# Altium PCB PCB_AUTO-PUMP.PcbDoc
Units mm, origin at the board's own origin, x right, y up, seen from the top; angles counter-clockwise.
Board outline 101.09 x 71.12 mm, 2 copper layers (Top Layer, Bottom Layer); 37 components, 23 nets, 127 pads, 4 vias.
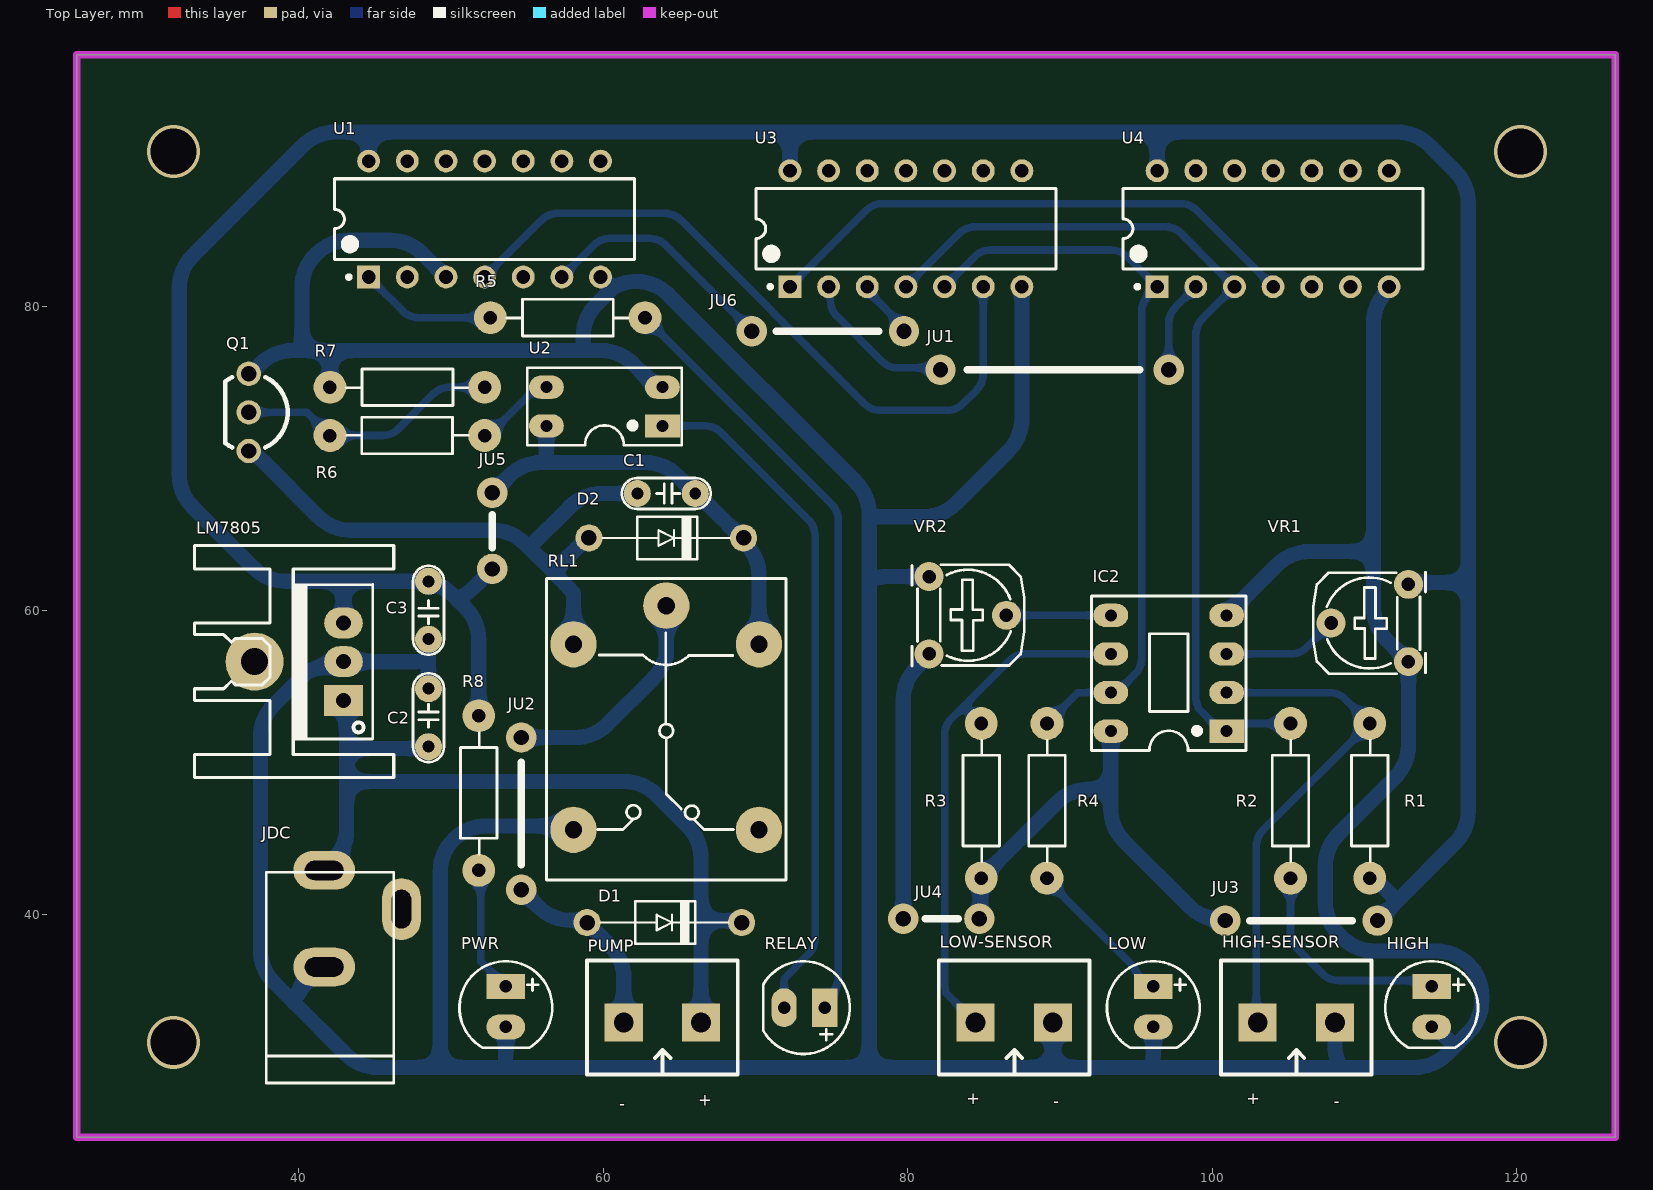
[diagram p0: Top Layer view]
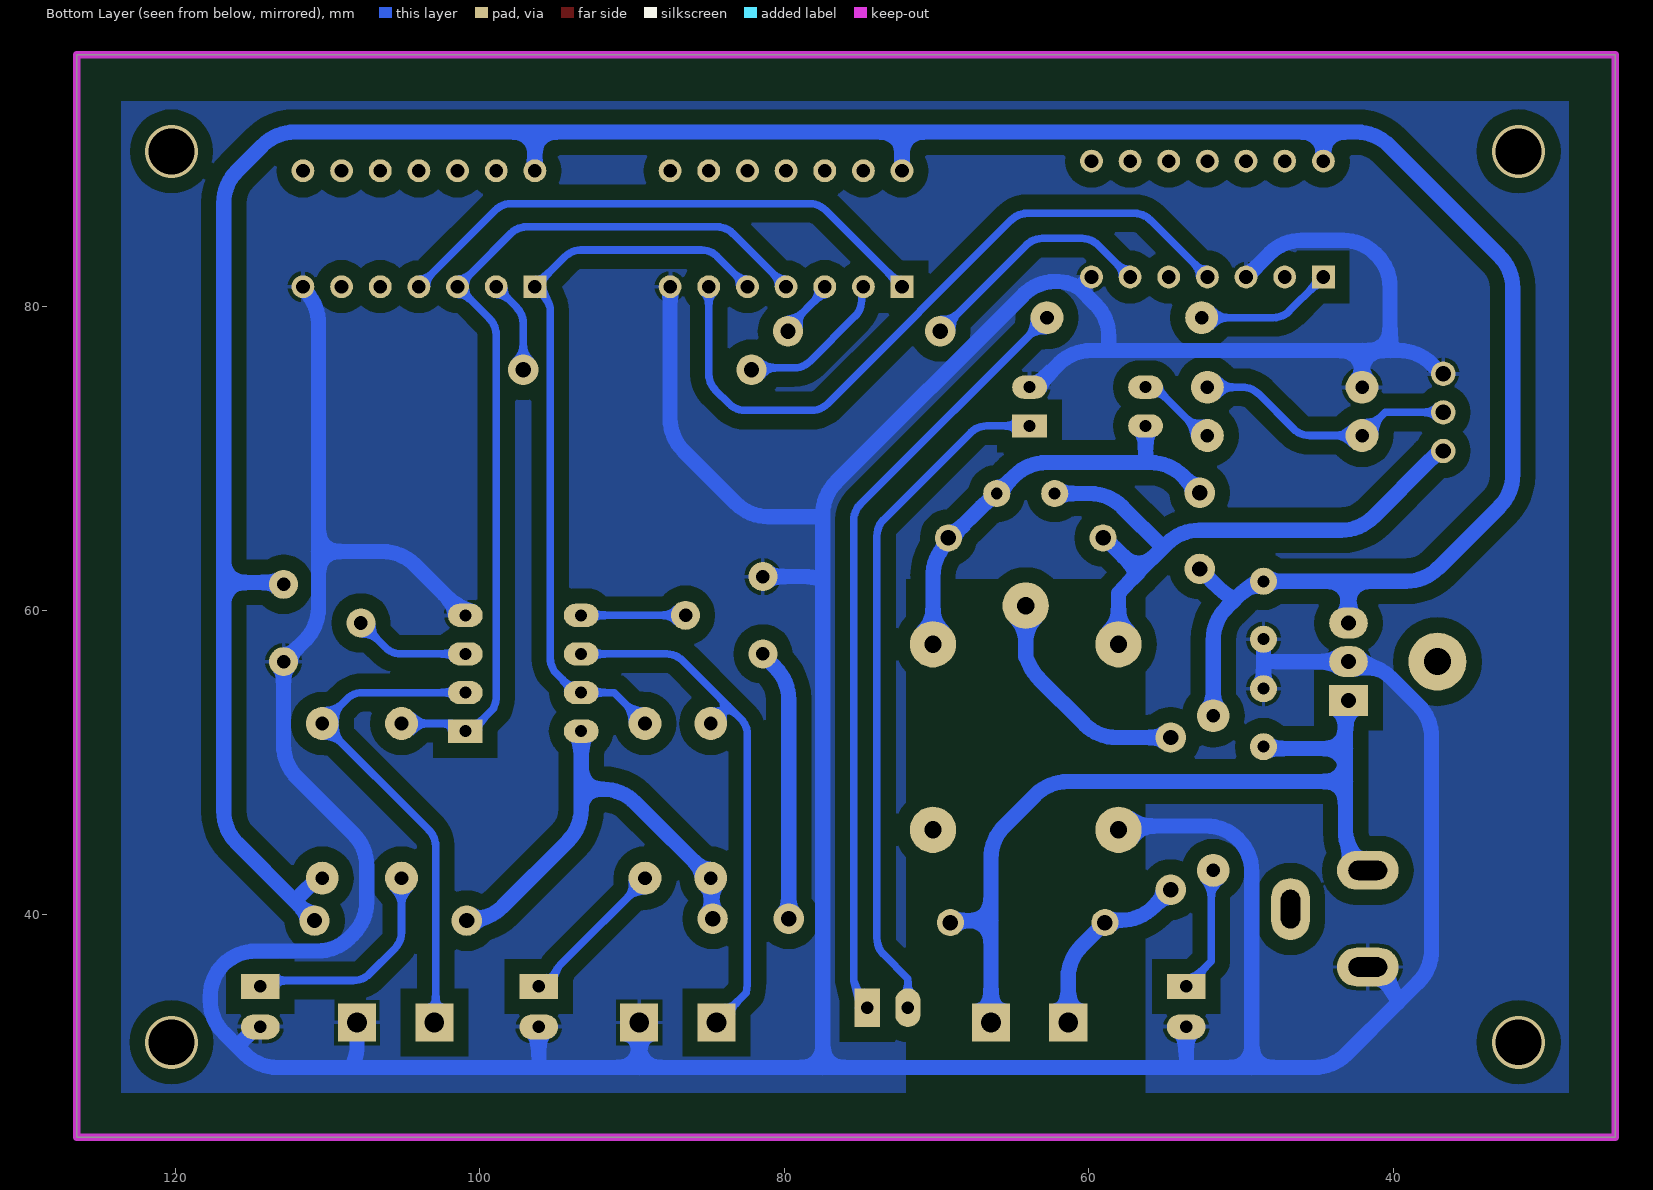
[diagram p1: Bottom Layer view, seen from below]
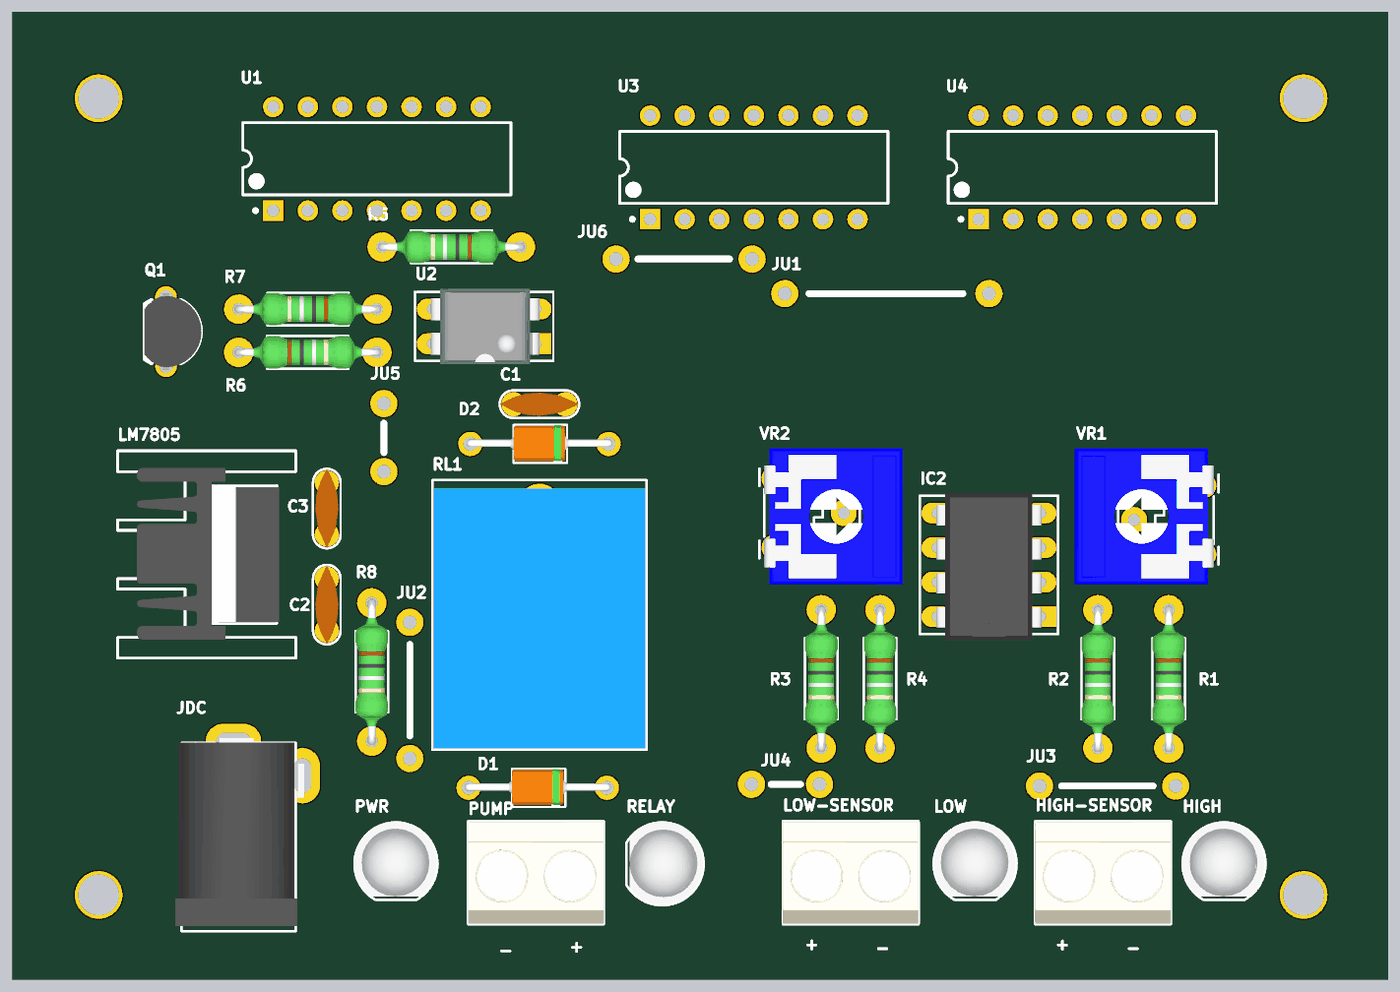
[diagram p2: 3D render of the assembled board from above, using the file's embedded part models]

## Layer stack, top to bottom
Top Solder: solder mask 0.0102, Solder Resist, Dk 3.5
Top Layer: signal copper 0.0356
Dielectric 1: dielectric 0.32, FR-4, Dk 4.8
Bottom Layer: signal copper 0.0356
Bottom Solder: solder mask 0.0102, Solder Resist, Dk 3.5

## Board outline
25.4,25.4 25.4,96.52 126.492,96.52 126.492,25.4

## Design rules (kind name [scope] priority, off if disabled: settings)
Clearance [All] p1: gap=0.5 ignorepadtopadclearanceinfootprint=FALSE
PolygonConnect [All] p1: connectstyle=Relief reliefconductorwidth=0.254 reliefentries=4 polygonreliefangle="90 Angle" airgapwidth=0.254
RoutingVias [All] p1: holewidth=1 width=1.5 viastyle="Through Hole" minholewidth=1 minwidth=1.5 maxholewidth=1 maxwidth=1.5
SolderMaskExpansion [All] p1: expansion=0.102 istentingtop=FALSE
Width [All] p1: maxlimit=1 minlimit=0.4 preferedwidth=0.5
30 further rules are at their usual default settings.

## Components (designator, comment, footprint, x,y, rotation, side; value= is the part's Value field where it differs from the comment)
C1 "100nF" CN1.5 64.262,67.691 r180 top value=33pF
C2 "1uF" CN1.5 48.514,53.086 r270 top value=33pF
C3 "100nF" CN1.5 48.514,59.893 r90 top value=33pF
D1 "1N4007" DIO-1A 58.928,39.497 r0 top value=1N5007
D2 "1N4007" DIO-1A 59.055,64.77 r0 top value=1N5007
HIGH "LED" LED-5-Green 114.427,35.179 r270 top value="LED 3 ly Single Colour"
HIGH-SENSOR "KF2" KF2-5.08 105.537,32.931 r180 top
IC2 "LM358" DIP8 97.155,55.753 r90 top
JDC "Jac DC" DC0 44.196,39.751 r90 top
JU1 "JUMPER" "JUMPER 15MM" 82.155,75.819 r0 top
JU2 "JUMPER" "JUMPER 10MM" 54.61,41.656 r90 top
JU3 "JUMPER" "JUMPER 10MM" 110.871,39.624 r180 top
JU4 "JUMPER" "JUMPER 5MM" 84.709,39.751 r180 top
JU5 "JUMPER" "JUMPER 5MM" 52.705,62.738 r90 top
JU6 "JUMPER" "JUMPER 10MM" 79.756,78.359 r180 top
LM7805 "LM78xx" TO220H1 42.926,56.642 r90 top
LOW "LED" LED-5-Green 96.139,35.179 r270 top value="LED 3 ly Single Colour"
LOW-SENSOR "KF2" KF2-5.08 86.995,32.931 r180 top
PUMP "KF2" KF2-5.08 63.881,32.931 r180 top
PWR "LED" LED-5-Green 53.594,35.179 r270 top value="LED 3 ly Single Colour"
Q1 "SS8050-DIP" SS8050DIP 36.703,73.025 r270 top
R1 "22K" RES-1/4W 110.49,47.879 r90 top
R2 "1K" RES-1/4W 105.283,47.879 r90 top
R3 "22K" RES-1/4W 84.963,47.879 r90 top
R4 "1K" RES-1/4W 89.281,47.879 r90 top
R5 "1K" RES-1/4W 58.039,79.121 r0 top
R6 "1K" RES-1/4W 46.736,71.628 r180 top
R7 "10K" RES-1/4W 47.498,74.549 r0 top
R8 "1K" RES-1/4W 51.943,48.387 r90 top
RELAY "LED" LED-5-Green 74.422,33.909 r180 top value="LED 3 ly Single Colour"
RL1 "Relay 10A/12V" "RELAY 5" 64.135,52.07 r270 top value="Relay SPDT, 10A, 12V"
U1 "CD4013BE" N0014A 52.197,85.725 r90 top
U2 "PC817" DIP4 63.881,72.136 r90 top
U3 "CD74HC08E" N0014A 79.883,85.09 r90 top
U4 "SN7404N" N0014A 104.013,85.09 r90 top
VR1 "50K" VR-S2 112.903,56.642 r90 top value="Volume 50k"
VR2 "50K" VR-S2 81.407,62.23 r270 top value="Volume 50k"

## Footprints (in the part's own frame and the unit in brackets; to place one, negate y for a bottom-side part, rotate by r counter-clockwise, add the part's x,y. Pads: shape width x height; smd on the part's side, far side on the other; paste and mask are expansions set on the pad)
CN1.5 [mil]
  round 70 hole 31: 1(-70,0) 2(80,0)
  silkscreen extent -110,-40 120,40, body extent -110,-33 120,33, height 235
DC0 [mil] "Jac DC input"
  oval 100x160 hole 50 slot 100 at 90 deg: 1(125,100) 2(-125,100)
  oval 160x100 hole 50 slot 100 at 0 deg: 3(25,-100)
  silkscreen extent -425,-80 120,250, body extent -410,-105 134,269, height 434
DIO-1A [mil]
  round 70 hole 40: 1(0,0) 2(400,0)
  silkscreen extent 35,-55 365,55, body extent -11,-50 411,54, height 102
DIP4 [mil]
  rect 60x90 hole 31: 1(0,0)
  oval 60x90 hole 31: 2(100,0) 3(100,300) 4(0,300)
  silkscreen extent -50,-50 150,350, body extent -59,-10 159,305, height 170
DIP8 [mil] "DIP, 8-Leads, Row Spacing 7.62mm, Pitch 2.54mm, Body 9.91x6.73mm"
  rect 60x90 hole 31: 1(-145,-150)
  oval 60x90 hole 31: 2(-45,-150) 3(55,-150) 4(155,-150) 5(155,150) 6(55,150) 7(-45,150) 8(-145,150)
  silkscreen extent -195,-200 205,200, body extent -213,-153 213,153, height 177
"JUMPER 5MM" [mm]
  round 2 hole 1: 1(0,0) 2(5,0)
  silkscreen extent 1.4,0 3.56,0
"JUMPER 10MM" [mm]
  round 2 hole 1: 1(0,0) 2(10,0)
  silkscreen extent 1.65,0 8.38,0
"JUMPER 15MM" [mm]
  round 2 hole 1: 1(0,0) 2(15,0)
  silkscreen extent 1.78,0 13.08,0
KF2-5.08 [mm]
  rect 2.5x2.5 hole 1.3: 1(-2.54,0) 2(2.54,0)
  silkscreen extent -4.95,-4.08 4.95,3.43, body extent -5,-4.07 5,3.43, height 10
LED-5-Green [mil] "LED 2 PIN, 5 ly , Only colour,pin to pin 100mil"
  rect 65x100 hole 32: 1(-5,0)
  oval 65x100 hole 32: 2(100,0)
  silkscreen extent -70,-120 154,120, body extent -69,-120 145,117, height 339
N0014A [mm] "DIP, 14-Leads, Body 19.7x6.6mm, Pitch 2.54mm"
  rect 1.5x1.5 hole 0.9: 1(-3.81,7.62)
  round 1.5 hole 0.9: 2(-3.81,5.08) 3(-3.81,2.54) 4(-3.81,0) 5(-3.81,-2.54) 6(-3.81,-5.08) 7(-3.81,-7.62) 8(3.81,-7.62) 9(3.81,-5.08) 10(3.81,-2.54) 11(3.81,0) 12(3.81,2.54) 13(3.81,5.08) 14(3.81,7.62)
  silkscreen extent -3.93,-9.85 2.65,9.85, body extent -3.95,-9.85 3.95,9.85, height 5.08
"RELAY 5" [mil] "Reley DPDT, 8 pin, 1A, W400mil, L800mil,H 300mil"
  round 120 hole 45: 1(-325,0) 2(255,240) 3(255,-240) 4(-225,-240) 5(-225,240)
  silkscreen extent -395,-310 385,310, body extent -371,-304 381,306, height 602
RES-1/4W [mil]
  round 85 hole 35: 1(-215,5) 2(185,5)
  silkscreen extent -173,-42 141,52, body extent -227,-42 197,52, height 95
SS8050DIP [mm] "NPN BJT"
  round 1.6 hole 1 mask+0.1: 1(-2.54,0) 2(0,0) 3(2.54,0)
  silkscreen extent -2.31,-1.55 2.31,2.55, body extent -2.79,-1.59 2.79,2.61, height 7
TO220H1 [mil] "TO-220 - 1-2-3"
  round 150 hole 70: 0(0,230)
  rect 80x100 hole 39: 1(-100,0)
  oval 80x100 hole 39: 2(0,0) 3(100,0)
  silkscreen extent -300,-130 300,385, body extent -246,-82 250,329, height 1000
VR-S2 [mil] "Resistor Variable"
  round 75 hole 35: 1(0,0) 2(100,200) 3(200,0)
  silkscreen extent -31,-44 231,246, body extent -87,-30 307,372, height 165

## Part data
C1 C2 C3: library part CN
D1 D2: library part Diode, "Default Diode", Code - JEDEC=DO-214-AB, Published=8-Jun-2000, Publisher="Altium Limited", Revision="July-2002: Re-released for DXP Platform."
HIGH LOW PWR RELAY: "LED Single colour Green and Red"
HIGH-SENSOR LOW-SENSOR PUMP: Manufacturer="Würth Elektronik eiSos GmbH", PartNo=691103110002, ComponentLink1 Description=Manufacturer, ComponentLink1URL=http://www.we-online.com, ComponentLink2 Description=Datasheet, ComponentLink2URL=http://katalog.we-online.de/em/datasheet/6911031100xx.pdf, Created by="Karrer Zheng", Created Date="29 October 2013", NoPins=2
IC2: "Low-Power Dual Operational Amplifier"
JDC: library part DCIN, "Jac DC input"
LM7805: "Positive Voltage Regulator", ComponentLink1Description="Manufacturer Link", ComponentLink1URL=http://www.st.com/, ComponentLink2Description=Datasheet, ComponentLink2URL=http://www.st.com/stonline/products/literature/ds/2146/l78m05c.pdf, DatasheetVersion=Apr-1994, LatestRevisionDate=17-Jul-2002, LatestRevisionNote="Re-released for DXP Platform.", Note="Tab is connected to pin 3 (GND).", PackageDescription="TO, Thru-Hole, Vertical, Heatsink Mounted; 3 In-Line Leads; Pitch 2.54 mm; Pin sequence 1, 3, 2", PackageReference=ISOWATT220AB, PackageVersion=Jul-1998, Published=24-Aug-2001, Publisher="Altium Limited"
Q1: "NPN transistor through hole"
R1 R2 R3 R4 R5 R6 R7 R8: library part Res, "Res", Manufacturer="Generic Components", Class=Passive, Published=08/06/2000, Publisher="Altium Hobart Technology Centre", SubClass=R
RL1: library part "Relay 5", "Relay SPDT,10A - 12VDC 5 Pin"
U1: library part CMP-1619-00744-2, "CMOS Dual D-Type Flip Flop, N0014A, TUBE", F @ Nom Voltage(Max)(Mhz)=8, Generic Part Number=CD4013B, ICC @ Nom Voltage(Max)(mA)=0.06, Manufacturer="Texas Instruments", Operating Temperature Range(C)="-55 to 125", Rating=Military, tpd @ Nom Voltage(Max)(ns)=130, Voltage(Nom)(V)=10, 3-State Output=No, Bits(#)=2, Code_JEDEC=MS-001, DatasheetVersion=SCHS023D, Input Type=CMOS, Output Drive (IOL/IOH)(Max)(mA)=1.5/-1.5, Output Logic=Inverted,Non-inverted, Output Type=CMOS, PackageReference=N0014A, Schmitt Trigger=No, Technology Family=CD4000, VCC(Max)(V)=18, VCC(Min)(V)=3
U2: "Single Opto"
U3: library part CMP-0777-00277-3, "High Speed CMOS Logic Quad 2-Input AND Gates, N0014A, TUBE", F @ Nom Voltage(Max)(Mhz)=70, Generic Part Number=CD74HC08, ICC @ Nom Voltage(Max)(mA)=0.02, Manufacturer="Texas Instruments", Operating Temperature Range(C)="-55 to 125", Rating=Catalog, tpd @ Nom Voltage(Max)(ns)=23, Voltage(Nom)(V)=5, Bits(#)=4, DatasheetVersion=SCHS118C, Input Type=CMOS, Output Drive (IOL/IOH)(Max)(mA)=-24/24, Output Type=CMOS, PackageReference=N0014A, Schmitt Trigger=No, Technology Family=HC, VCC(Max)(V)=6, VCC(Min)(V)=2
U4: library part CMP-1615-00872-2, "Hex inverters, N0014A, TUBE", F @ Nom Voltage(Max)(Mhz)=35, Generic Part Number=SN7404, ICC @ Nom Voltage(Max)(mA)=0.033, Manufacturer="Texas Instruments", Operating Temperature Range(C)="0 to 70", Rating=Catalog, tpd @ Nom Voltage(Max)(ns)=22, Voltage(Nom)(V)=5, Bits(#)=6, Code_JEDEC=MS-001, DatasheetVersion=SDLS029C, Input Type=TTL, Output Drive (IOL/IOH)(Max)(mA)=-0.4/16, Output Type=CMOS, PackageReference=N0014A, Schmitt Trigger=No, Technology Family=TTL, VCC(Max)(V)=5.25, VCC(Min)(V)=4.75
VR1 VR2: library part VR-S, "Var Resistor"

## Via types
v1: diameter 3.5, hole 3, Top Layer to Bottom Layer, 4 vias

## Nets (pads, with @x,y where several pads share a name; then routed paths per layer and width w, separated by ;. In a path a pad name is that pad's centre, name@x,y a point inside that pad or via, vN(x,y) a via of type N, cw(c..) or ccw(c..) an arc to the next point about the centre after c; other vN are vias at no path point)
5V: C1.1 C3.2 D2.2 IC2.8 JU3.1 JU3.2 JU4.1 JU4.2 JU5.1 JU5.2 LM7805.3 R1.1 R3.1 R8.2 RL1.5 U1.14 U2.4 U3.14 U4.14 VR1.3 VR2.3 | length 279.1
  Bottom Layer w1: LM7805.3 42.926,61.925 ; U1.14 44.577,91.44 ; R8.2 51.816,58.066 ccw(c48.816,58.066) 50.937,60.188 50.355,60.77 ; JU5.1 ccw(c54.762,60.554) 52.637,62.671 51.991,62.024 cw(c49.863,64.139) 51.984,62.017 51.421,61.454 cw(c49.303,63.579) 50.356,60.77 ; JU5.2 53.813,68.846 cw(c55.933,66.723) 55.933,69.723 62.765,69.723 cw(c62.765,66.723) 64.887,68.844 C1.1 66.957,66.891 cw(c64.988,64.628) 67.112,66.746 68.636,65.222 ccw(c70.758,67.343) 69.213,64.771 D2.2 ccw(c71.932,66.041) 69.407,64.422 69.46,64.339 cw(c66.936,62.717) 69.464,64.333 69.754,63.881 cw(c67.231,62.257) 70.231,62.257 RL1.5 ; 56.134,69.723 ccw(c53.261,70.587) 56.261,70.583 U2.4 ; U3.14 72.263,91.44 ; JU4.2 79.709,54.137 cw(c82.709,54.137) 80.585,56.256 81.055,56.726 ccw(c78.932,58.845) VR2.3 ; JU4.1 ccw(c81.772,40.365) 84.772,40.361 84.772,41.804 cw(c87.773,41.804) R3.1 89.801,47.383 cw(c91.921,45.26) 91.921,48.26 93.345,48.26 ; IC2.8 93.345,48.26 ; U4.14 ccw(c93.393,88.906) 96.393,88.902 96.393,91.44 ; JU3.2 100.865,39.625 ccw(c100.311,36.677) 100.626,39.66 100.313,39.694 cw(c100.631,42.677) 98.512,40.553 94.222,44.843 cw(c96.345,46.963) 93.345,46.963 93.345,48.26 ; R1.1 110.366,42.417 cw(c109.199,39.653) 111.323,41.772 111.791,41.304 ccw(c113.916,43.422) 112.204,40.958 ; JU3.1 112.204,40.957 ; VR1.3 cw(c113.767,58.849) 113.763,61.849 116.84,61.849 ; 42.926,61.925 39.139,61.925 cw(c39.139,64.925) 37.02,62.802 33.008,66.814 cw(c35.131,68.934) 32.131,68.934 32.131,81.18 cw(c35.131,81.18) 33.007,83.299 40.271,90.563 cw(c42.391,88.44) 42.391,91.44 44.577,91.44 ; 42.926,61.925 C3.2 49.11,61.652 49.289,61.57 cw(c48.041,58.842) 50.167,60.958 50.352,60.773 50.355,60.77 ; 44.577,91.44 72.263,91.44 ; 72.263,91.44 96.393,91.44 ; 96.393,91.44 112.168,91.44 cw(c112.168,88.44) 114.291,90.56 115.96,88.891 cw(c113.84,86.768) 116.84,86.768 116.84,61.849 ; 112.204,40.957 115.963,44.716 ccw(c113.84,46.836) 116.84,46.836 116.84,61.849
12V: C2.2 D1.2 JDC.1 LM7805.1 PUMP.1 | length 56.6
  Bottom Layer w1: JDC.1 42.108,42.926 cw(c44.813,41.628) 42.207,43.115 42.72,44.01 ccw(c40.116,45.501) 43.116,45.497 43.116,48.768 ; LM7805.1 43.116,53.586 43.116,50.927 ; C2.2 cw(c47.65,53.927) 47.65,50.927 43.116,50.927 ; PUMP.1 66.421,39.624 ; D1.2 69.082,39.499 ccw(c68.224,36.624) 68.224,39.624 66.421,39.624 ; 43.116,48.768 61.368,48.768 cw(c61.368,45.768) 63.491,47.888 65.541,45.838 cw(c63.421,43.715) 66.421,43.715 66.421,39.624 ; 43.116,48.768 43.116,50.927
GND: C2.1 C3.1 HIGH-SENSOR.1 HIGH.2 IC2.4 JDC.2 LM7805.2 LOW-SENSOR.1 LOW.2 PWR.2 Q1.1 R7.1 RL1.3 U1.3 U1.7 U2.2 U3.7 U4.7 VR1.1 VR2.1 | length 364.9
  Bottom Layer w1: Q1.1 ccw(c35.16,78.138) 37.278,76.013 37.477,76.212 cw(c39.597,74.089) 39.597,77.089 40.195,77.089 ; JDC.2 41.202,36.576 41.202,36.574 cw(c38.548,37.973) 40.754,35.941 40.7,35.882 40.401,35.557 ccw(c42.603,33.52) 39.687,34.227 ; R7.1 42.037,77.089 ; C2.1 48.514,56.769 ; C3.1 48.514,58.112 ccw(c51.512,58.013) 48.512,58.008 48.514,57.037 cw(c45.514,57.034) 48.514,57.028 48.514,56.769 ; U1.3 48.123,83.449 ccw(c46.001,81.328) 46.001,84.328 43.28,84.328 ccw(c43.28,81.328) 41.16,83.451 41.072,83.363 ccw(c43.196,81.244) 40.195,81.244 40.195,77.089 ; 53.467,29.972 ccw(c50.594,30.836) 53.594,30.832 PWR.2 ; RL1.3 57.785,45.847 52.297,45.847 ccw(c52.297,42.847) 50.177,44.97 50.152,44.945 ccw(c52.276,42.826) 49.276,42.826 49.276,29.972 ; U1.7 59.82,81.913 cw(c58.274,79.342) 60.398,81.461 60.639,81.22 60.642,81.216 ; U2.2 63.5,74.676 61.967,76.209 ccw(c59.844,74.089) 59.844,77.089 58.674,77.089 ; VR2.1 81.404,62.23 ccw(c81.343,59.231) 81.335,62.231 80.547,62.23 cw(c80.545,65.23) 80.545,62.23 78.674,62.23 ccw(c78.678,59.23) 77.47,61.976 ; U3.7 87.503,72.617 cw(c84.503,72.617) 86.626,70.497 83.172,67.043 cw(c81.053,69.167) 81.053,66.167 77.47,66.167 ; LOW-SENSOR.1 89.535,29.972 ; 96.012,29.972 ccw(c93.139,30.836) 96.139,30.832 LOW.2 ; IC2.4 101.017,59.69 cw(c103.442,57.924) 101.317,60.042 104.279,63.004 cw(c106.399,60.881) 106.399,63.881 110.617,63.881 ; HIGH-SENSOR.1 108.077,31.431 ccw(c111.077,31.435) 108.456,29.975 108.458,29.972 ; U4.7 cw(c109.048,82.802) 111.467,81.027 111.196,80.658 ccw(c113.617,78.886) 110.617,78.886 110.617,63.881 ; HIGH.2 114.718,32.639 ccw(c117.047,34.53) 114.922,32.412 115.41,31.924 cw(c113.294,29.798) 115.886,31.309 115.887,31.305 ; 39.688,34.227 43.065,30.849 ccw(c45.185,32.972) 45.185,29.972 49.276,29.972 ; 39.688,34.227 38.342,35.572 cw(c40.465,37.692) 37.465,37.692 37.465,51.672 cw(c40.465,51.672) 38.341,53.791 40.118,55.568 cw(c42.237,53.445) 41.861,56.421 41.951,56.432 ccw(c41.566,59.407) 42.729,56.642 47.65,56.642 ccw(c47.65,59.642) 48.514,56.769 ; 40.195,77.089 42.037,77.089 ; 42.037,77.089 58.674,77.089 ; 49.276,29.972 77.47,29.972 ; 58.674,77.089 58.674,78.005 cw(c61.674,78.005) 59.55,80.124 60.642,81.216 ; 60.643,81.216 cw(c62.162,78.63) 64.287,80.747 76.59,68.444 cw(c74.47,66.321) 77.47,66.321 77.47,66.167 ; 77.47,29.972 77.47,61.976 ; 77.47,29.972 89.535,29.972 ; 77.47,61.976 77.47,66.167 ; 89.535,29.972 108.458,29.972 ; 108.458,29.972 113.311,29.972 ccw(c113.311,32.972) 115.43,30.848 115.887,31.305 ; 110.617,63.881 110.617,60.171 ccw(c113.617,60.171) 111.494,58.051 VR1.1 112.903,51.154 cw(c109.903,51.154) 112.026,49.034 108.318,45.326 ccw(c110.442,43.207) 107.442,43.207 107.442,40.867 ccw(c110.442,40.867) 108.319,38.747 108.565,38.5 ccw(c110.685,40.624) 110.685,37.624 114.729,37.624 cw(c114.729,34.624) 117.729,34.624 117.729,34.39 cw(c114.729,34.39) 116.852,32.27 115.887,31.305
NetC1_2: C1.2 D2.1 Q1.3 RL1.4 | length 40.3
  Bottom Layer w0.5: Q1.3 Q1.3@36.957,70.485
  Bottom Layer w1: Q1.3@36.957,70.485 36.788,70.485 cw(c35.344,67.855) 37.467,69.975 37.55,69.892 cw(c35.436,67.763) 37.561,69.881 41.285,66.157 ccw(c43.407,68.278) 43.407,65.278 52.732,65.278 cw(c52.732,62.278) 54.854,64.399 55.115,64.138 55.118,64.135 ; RL1.4 58.039,61.139 57.25,61.999 ccw(c55.039,59.971) 57.16,62.093 56.706,62.547 ; D2.1 58.409,64.233 ccw(c60.326,61.926) 58.207,64.049 56.706,62.547 ; C1.2 59.917,67.691 ccw(c59.917,64.691) 57.797,66.814 55.118,64.135 ; 55.118,64.135 56.706,62.547
NetD1_1: D1.1 JU2.1 JU2.2 PUMP.2 RL1.1 | length 27.7
  Bottom Layer w1: JU2.1 55.744,40.522 ccw(c57.863,42.646) 57.863,39.646 57.995,39.646 cw(c57.995,36.646) 58.922,39.499 D1.1 59.638,38.787 60.462,37.963 cw(c58.341,35.841) 61.266,36.506 61.341,36.178 PUMP.2 ; JU2.2 58.16,51.656 ccw(c58.16,54.656) 60.279,52.532 63.258,55.511 ccw(c61.135,57.631) 63.859,56.374 64.135,56.971 64.135,59.817 64.129,59.956 cw(c67.126,60.091) 64.135,60.322 RL1.1
NetHIGH-SENSOR_2: HIGH-SENSOR.2 IC2.2 R1.2 | length 32.9
  Bottom Layer w0.5: IC2.2 107.71,54.61 cw(c107.71,53.11) 108.463,54.407 108.632,54.309 R1.2 103.346,45.561 ccw(c104.408,44.502) 102.908,44.502 102.908,33.931 HIGH-SENSOR.2
NetHIGH_1: HIGH.1 R2.1 | length 14.5
  Bottom Layer w0.5: R2.1 105.156,38.848 ccw(c106.656,38.848) 105.594,37.789 107.258,36.125 ccw(c108.317,37.187) 108.317,35.687 113.407,35.687 HIGH.1
NetIC2_1: IC2.1 R2.2 U3.4 U4.3 | length 60.2
  Bottom Layer w0.5: U3.4 83.382,84.779 cw(c84.441,83.717) 84.441,85.217 96.915,85.217 cw(c96.915,83.717) 97.976,84.777 100.412,82.341 101.101,81.652 U4.3 cw(c100.351,82.275) 101.407,81.21 100.975,80.782 ccw(c102.031,79.717) 100.97,80.777 99.371,79.178 ccw(c100.433,78.119) 98.933,78.119 98.933,54.342 ccw(c100.433,54.342) 99.007,53.878 99.118,53.536 100.072,52.582 IC2.1 101.858,52.578 R2.2
NetIC2_3: IC2.3 VR1.2 | length 7.6
  Bottom Layer w0.5: IC2.3 105.17,57.15 ccw(c105.17,58.65) 106.229,57.588 VR1.2
NetIC2_5: IC2.5 VR2.2 | length 6.9
  Bottom Layer w0.5: VR2.2 86.489,59.69 ccw(c86.55,61.189) 86.554,59.689 VR2.2@87.087,59.69 ; VR2.2@87.088,59.69 IC2.5
NetIC2_6: IC2.6 LOW-SENSOR.2 R3.2 | length 34.7
  Bottom Layer w0.5: LOW-SENSOR.2 83.455,33.931 82.501,34.885 82.435,35.392 cw(c83.923,35.584) 82.423,35.584 82.423,51.83 cw(c83.923,51.83) 82.861,52.889 83.693,53.721 ; R3.2 83.693,53.721 ; IC2.6 87.743,57.15 ccw(c87.743,55.65) 86.684,56.712 83.693,53.721
NetIC2_7: IC2.7 R4.2 U3.5 U4.1 | length 48.9
  Bottom Layer w0.5: U3.5 84.398,83.255 cw(c85.457,82.193) 85.457,83.693 93.359,83.693 cw(c93.359,82.193) 94.42,83.253 95.893,81.78 U4.1 95.815,80.702 ccw(c96.877,79.643) 95.377,79.643 95.377,56.882 cw(c93.877,56.882) 95.227,56.228 95.117,56.001 93.726,54.61 91.186,54.61 R4.2
NetLOW_1: LOW.1 R4.1 | length 10.1
  Bottom Layer w0.5: R4.1 89.154,42.291 94.691,36.754 cw(c93.631,35.693) 95.118,35.886 95.119,35.882 LOW.1
NetPWR_1: PWR.1 R8.1 | length 8.4
  Bottom Layer w0.5: R8.1@51.943,42.799 51.943,36.957 PWR.1
  Bottom Layer w1: R8.1 R8.1@51.943,42.799
NetQ1_2: Q1.2 R6.2 R7.2 | length 17.3
  Bottom Layer w0.5: Q1.2 40.513,73.025 R6.2 45.48,71.501 ccw(c45.48,73.001) 46.539,71.939 48.838,74.238 cw(c49.897,73.176) 49.604,74.647 49.749,74.676 52.07,74.676 ccw(c52.133,76.175) R7.2
NetR5_2: R5.2 RELAY.1 | length 50.8
  Bottom Layer w0.5: R5.2 74.999,66.987 cw(c73.938,65.927) 75.438,65.927 75.438,35.864 cw(c73.938,35.864) 75.217,35.081 75.125,34.929 RELAY.1
NetR6_1: R6.1 U2.3 | length 5.4
  Bottom Layer w0.5: R6.1 52.451,71.501 55.419,74.469 55.5,74.469 ccw(c55.5,75.969) 56.137,74.611 56.137,74.676 U2.3
NetRELAY_2: RELAY.2 U2.1 | length 45
  Bottom Layer w0.5: U2.1 66.689,72.136 cw(c66.689,70.636) 67.75,71.696 73.474,65.972 cw(c72.414,64.911) 73.914,64.911 73.914,38.467 cw(c72.414,38.467) 73.476,37.408 71.882,35.814 RELAY.2
NetU1_4: U1.4 U3.6 | length 46.6
  Bottom Layer w0.5: U1.4 ccw(c51.202,83.037) 52.263,81.977 52.698,82.416 55.95,85.668 cw(c57.009,84.606) 57.009,86.106 64.022,86.106 cw(c64.022,84.606) 65.083,85.666 77.158,73.591 ccw(c78.218,74.652) 78.218,73.152 82.564,73.152 ccw(c82.564,74.652) 83.623,73.59 84.525,74.492 ccw(c83.463,75.551) 84.963,75.551 U3.6
NetU1_6: JU6.1 JU6.2 U1.6 U3.3 | length 19.8
  Bottom Layer w0.5: U1.6 59.379,84.017 cw(c60.438,82.955) 60.438,84.455 63.039,84.455 cw(c63.039,82.955) 64.1,84.015 69.322,78.793 cw(c68.265,77.728) 69.323,78.792 69.703,78.414 cw(c68.649,77.346) JU6.2 JU6.2 ; U3.3 ccw(c78.78,81.71) 77.721,80.648 79.379,78.99 cw(c78.319,77.929) 79.755,78.362 JU6.1
NetU3_1: U3.1 U4.4 | length 36.1
  Bottom Layer w0.5: U3.1 77.286,86.303 cw(c78.345,85.241) 78.345,86.741 97.931,86.741 cw(c97.931,85.241) 98.992,86.301 U4.4
NetU3_2: JU1.1 JU1.2 U3.2 U4.2 | length 16.4
  Bottom Layer w0.5: U3.2 74.805,81.276 cw(c73.419,80.701) 74.919,80.701 74.919,80.388 ccw(c76.419,80.388) 75.357,79.329 78.3,76.386 ccw(c79.359,77.449) 79.359,75.949 81.545,75.949 cw(c81.545,74.449) JU1.1 JU1.1 ; JU1.2 97.155,78.86 cw(c98.655,78.86) 97.593,79.919 98.796,81.123 ccw(c97.735,82.183) U4.2
RELAY_PIN: R5.1 U1.1 | length 9
  Bottom Layer w0.5: U1.1 45.077,81.415 46.806,79.686 ccw(c47.865,80.748) 47.865,79.248 R5.1
pads on no net: JDC.3 LM7805.0 RL1.2 U1.2 U1.5 U1.8 U1.9 U1.10 U1.11 U1.12 U1.13 U3.8 U3.9 U3.10 U3.11 U3.12 U3.13 U4.5 U4.6 U4.8 U4.9 U4.10 U4.11 U4.12 U4.13
copper on no net:
  other v1: 31.75,31.623 120.269,31.623 31.75,90.17 120.269,90.17

## Polygon pours and split planes (outlines as drawn)
GND on Bottom Layer "GND_L02_P000" (solid, pour order 0): 28.448,93.472 123.571,93.472 123.571,28.321 28.448,28.321

## Keep-outs
Keep-Out Layer:
  the board outline again, w0.5

## Other copper
Bottom Layer:
  pour cut-out: 56.261,62.103 72.009,62.103 72.009,28.321 56.261,28.321

## Silkscreen, mask and mechanical layers (free items; w line width, h text height)
Top Overlay:
  text "+" at 84.763,28.254 h0.8 r180
  text "+" at 103.178,28.254 h0.8 r180
  text "-" at 89.97,27.988 h0.8 r180
  text "-" at 108.385,27.988 h0.8 r180
  text "+" at 66.24,27.455 h0.8
  text "-" at 61.033,27.188 h0.8

## Text inside footprints (layer, text, board x,y; h text height)
Q1: Mechanical 1 "B" at 36.303,73.225 h0.8 r270; Mechanical 1 "C" at 36.303,70.725 h0.8 r270; Mechanical 1 "E" at 36.303,75.825 h0.8 r270